# Altium PCB PCB.PcbDoc
Units mm, origin at the board's own origin, x right, y up, seen from the top; angles counter-clockwise.
Board outline 37 x 19.5 mm, 2 copper layers (L1, L2), stack 1.67 mm thick; 10 components, 6 nets, 20 pads, 2 vias.
Unrouted connection lines stored in the file: 2.
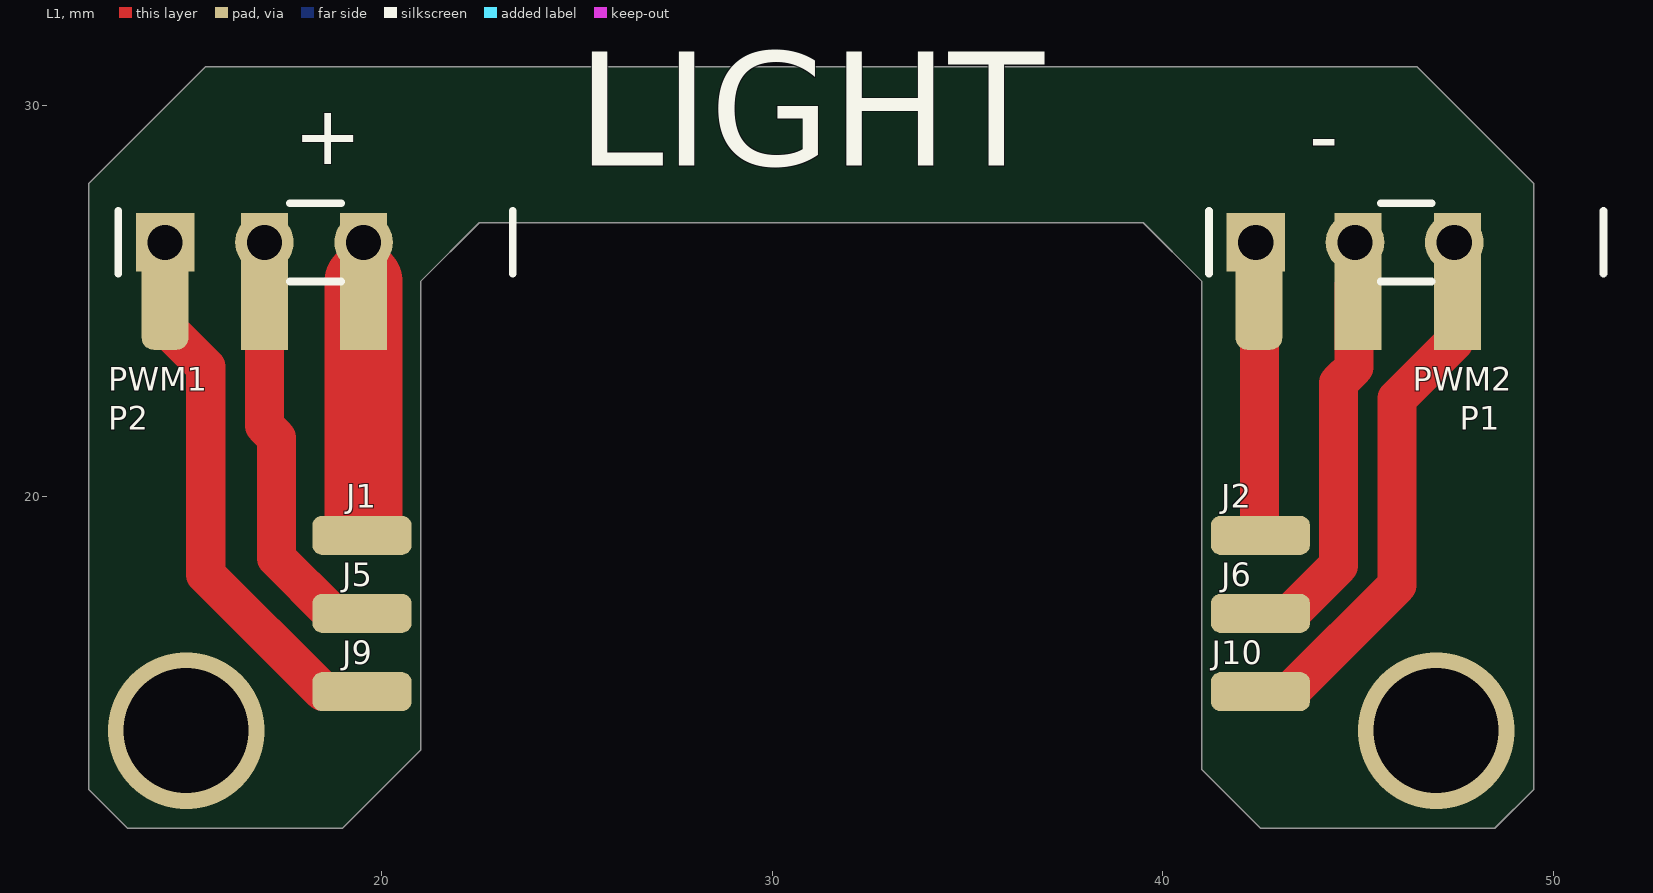
[diagram p0: L1 view]
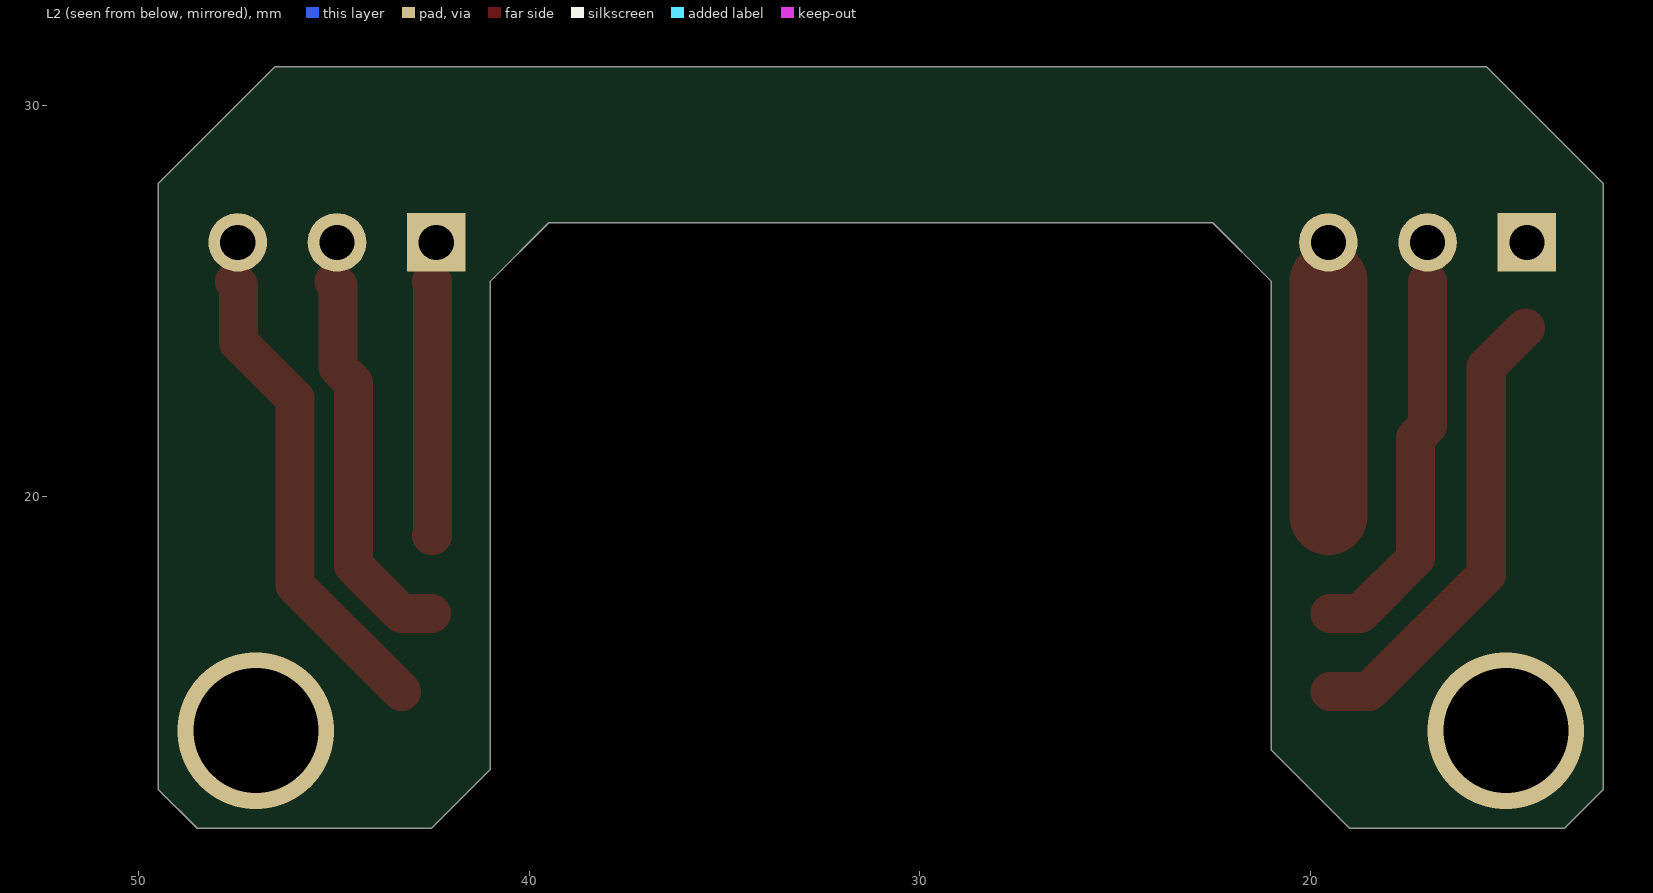
[diagram p1: L2 view, seen from below]

## Layer stack, top to bottom
Top Solder: solder mask 0.01, Solder Resist, Dk 3.5
L1: signal copper 0.035
Dielectric 1: dielectric 1.6, FR-4, Dk 4.8
L2: signal copper 0.035
Bottom Solder: solder mask 0.01, Solder Resist, Dk 3.5

## Board outline
12.5,12.5 13.5,11.5 19,11.5 21,13.5 21,25.5 22.5,27 39.5,27 41,25.5 41,13 42.5,11.5 48.5,11.5 49.5,12.5 49.5,28 46.5,31 15.5,31 12.5,28

## Design rules (kind name [scope] priority, off if disabled: settings)
BoardOutlineClearance [All] p1: gap=0.22 ignorepadtopadclearanceinfootprint=FALSE
Clearance [All] p1: gap=0.127 ignorepadtopadclearanceinfootprint=FALSE
ComponentClearance [All] p1: gap=0.254 collisioncheckmode=3 verticalgap=2540 showdistances=FALSE
DiffPairsRouting [All] p1: maxlimit=0.254 minlimit=0.254 mostfreqgap=0.254 toplayer_minwidth=0.381 toplayer_maxwidth=0.381 toplayer_prefwidth=0.381 bottomlayer_minwidth=0.381 bottomlayer_maxwidth=0.381 bottomlayer_prefwidth=0.381 substack1={31958C4A-F182-4360-B04C-72C47044B48F} toplayer_{31958c4a-f182-4360-b04c-72c47044b48f}_minwidth=0.381 toplayer_{31958c4a-f182-4360-b04c-72c47044b48f}_maxwidth=0.381 toplayer_{31958c4a-f182-4360-b04c-72c47044b48f}_prefwidth=0.381 bottomlayer_{31958c4a-f182-4360-b04c-72c47044b48f}_minwidth=0.381 bottomlayer_{31958c4a-f182-4360-b04c-72c47044b48f}_maxwidth=0.381 bottomlayer_{31958c4a-f182-4360-b04c-72c47044b48f}_prefwidth=0.381 maxuncoupledlength=12.7
FanoutControl Fanout_SOIC [IsSOIC] p3: bgadir=Out bgaviamode=Closest fanoutstyle=Auto fanoutdirection=Alternating viagrid=0.025 // Fanout_SOIC (Default Rule)
FanoutControl Fanout_Small [(CompPinCount < 5)] p4: bgadir=Out bgaviamode=Closest fanoutstyle=Auto fanoutdirection=OutThenIn viagrid=0.025 // Fanout_Small (Default Rule)
FanoutControl Fanout_Default [All] p5: bgadir=In bgaviamode=Closest fanoutstyle=Auto fanoutdirection=Alternating viagrid=0.025 // Fanout_Default (Default Rule)
HoleSize [All] p1: absolutevalues=TRUE maxlimit=4.5 minlimit=0.25 maxpercent=80.000 minpercent=20.000
HoleToHoleClearance [All] p1: gap=0.3 allowstackedmicrovias=TRUE
MinimumSolderMaskSliver [All] p1: minsoldermaskwidth=0.1
PlaneClearance [All] p1: clearance=0.2
PlaneConnect [All] p1: planeconnectstyle=Direct reliefexpansion=0.5 reliefentries=4 reliefconductorwidth=0.2 reliefairgap=0.25
PolygonConnect PolygonConnect_1 [InNet('GND')] p1: connectstyle=Direct reliefconductorwidth=0.254 reliefentries=4 polygonreliefangle="90 Angle" airgapwidth=0.254
PolygonConnect [All] p2: connectstyle=Direct reliefconductorwidth=0.3 reliefentries=4 polygonreliefangle="90 Angle" airgapwidth=0.16
RoutingCorners [All] p1: cornerstyle=45-Degree minsetback=2.5 maxsetback=2.5
RoutingPriority [All] p1 off: routingpriority=0
RoutingVias [All] p1: holewidth=0.25 width=0.504 viastyle="Through Hole" minholewidth=0.25 minwidth=0.504 maxholewidth=0.8 maxwidth=1.2
SilkToSilkClearance [All] p1: silktosilkclearance=0
SilkToSolderMaskClearance [IsPad] p1: minsilkscreentomaskgap=0 clearancetoexposedcopper=TRUE
SolderMaskExpansion [All] p1: expansion=0.05 istentingtop=FALSE
Width [All] p1: maxlimit=2 minlimit=0.127 preferedwidth=0.127 substack1={31958C4A-F182-4360-B04C-72C47044B48F}
16 further rules are at their usual default settings.

## Components (designator, comment, footprint, x,y, rotation, side; value= is the part's Value field where it differs from the comment)
J1 "PAD" PAD 19.5,19 r0 top
J2 "PAD" PAD 42.5,19 r0 top
J5 "PAD" PAD 19.5,17 r0 top
J6 "PAD" PAD 42.5,17 r0 top
J9 "PAD" PAD 19.5,15 r0 top
J10 "PAD" PAD 42.5,15 r0 top
P1 "Header 4" HDR1X4 42.38,26.5 r0 top
P2 "Header 4" HDR1X4 14.46,26.5 r0 top
PWM1 "B" "HDR Side 3 pin" 17,25.5 r0 top
PWM2 "B" "HDR Side 3 pin" 45,25.5 r0 top

## Footprints (in the part's own frame and the unit in brackets; to place one, negate y for a bottom-side part, rotate by r counter-clockwise, add the part's x,y. Pads: shape width x height; smd on the part's side, far side on the other; paste and mask are expansions set on the pad)
HDR1X4 [mm] "Connector; Header; 4 Position"
  rect 1.5x1.5 hole 0.9: 1(0,0)
  round 1.5 hole 0.9: 2(2.54,0) 3(5.08,0)
  silkscreen extent -1.2,-1 8.9,1
"HDR Side 3 pin" [mm]
  rrect50% 1.2x3.5 smd: 1(-2.54,0)
  rect 1.2x3.5 smd: 2(0,0) 3(2.54,0)
PAD [mm]
  rrect50% 2.54x1 smd: 1(0,0)

## Part data
J1 J2 J5 J6 J9 J10: "Header 1", ChipDip_Link=https://www.chipdip.ru/product/pls-3, HelpURL=https://static.chipdip.ru/lib/227/DOC000227157.pdf, MF="Connfly electronic (Zhenqin)", MP="PLS-3 (DS1021-1x3)", System=Connector, Type=SMD
P1 P2: "Header, 4-Pin"
PWM1 PWM2: library part "Header 3", "Header, 3-Pin", ChipDip_Link=https://www.chipdip.ru/product/pls-3, HelpURL=https://static.chipdip.ru/lib/227/DOC000227157.pdf, Instructions="plased to the side; see picture", MF="Connfly electronic (Zhenqin)", MP="PLS-3 (DS1021-1x3)", System=Connector, Type=SMD

## Free pads (board coordinates)
  round 4 hole 3.2: 9(15,14) 10(47,14)

## Via types
v1: diameter 4, hole 3.2, L1 to L2, 2 vias

## Nets (pads, with @x,y where several pads share a name; then routed paths per layer and width w, separated by ;. In a path a pad name is that pad's centre, name@x,y a point inside that pad or via, vN(x,y) a via of type N, cw(c..) or ccw(c..) an arc to the next point about the centre after c; other vN are vias at no path point)
NetJ1_1: J1.1 P2.3 PWM1.3 | length 6
  L1 w2: J1.1@19.54,19.5 PWM1.3
NetJ2_1: J2.1 P1.1 PWM2.1 | length 6.5
  L1 w1: J2.1 42.48,19 42.48,25.48 PWM2.1@42.5,25.5
NetJ5_1: J5.1 P2.2 PWM1.2 | length 10
  L1 w1: PWM1.2 17,21.809 17.316,21.493 17.316,18.414 18.73,17 J5.1
NetJ6_1: J6.1 P1.2 PWM2.2 | length 10
  L1 w1: J6.1 43.27,17 44.5,18.23 44.5,22.904 44.9,23.304 44.9,25.4 PWM2.2
NetJ9_1: J9.1 P2.1 pad.9 PWM1.1 | length 12
  L1 w1: PWM1.1@14.5,24.31 15.5,23.31 15.5,18 18.5,15 J9.1
NetJ10_1: J10.1 P1.3 pad.10 PWM2.3 | length 12.3
  L1 w1: J10.1@43.27,15 46,17.73 46,22.5 47.44,23.94 47.44,25.4 PWM2.3
copper on no net:
  other v1: 15,14 47,14

## Silkscreen, mask and mechanical layers (free items; w line width, h text height)
Top Overlay:
  text "+" at 17.754,28.5 h1.52
  text "-" at 43.754,28.492 h1.52
  text "LIGHT" at 25,27.5 h5
Mechanical 2:
  the board outline again, w0.254